# Altium PCB Sheet1._(1).PcbDoc
Units mm, origin at the board's own origin, x right, y up, seen from the top; angles counter-clockwise.
Board outline 74.63 x 74.6 mm, 2 copper layers (Top Layer, Bottom Layer); 24 components, 18 nets, 72 pads, 0 vias.
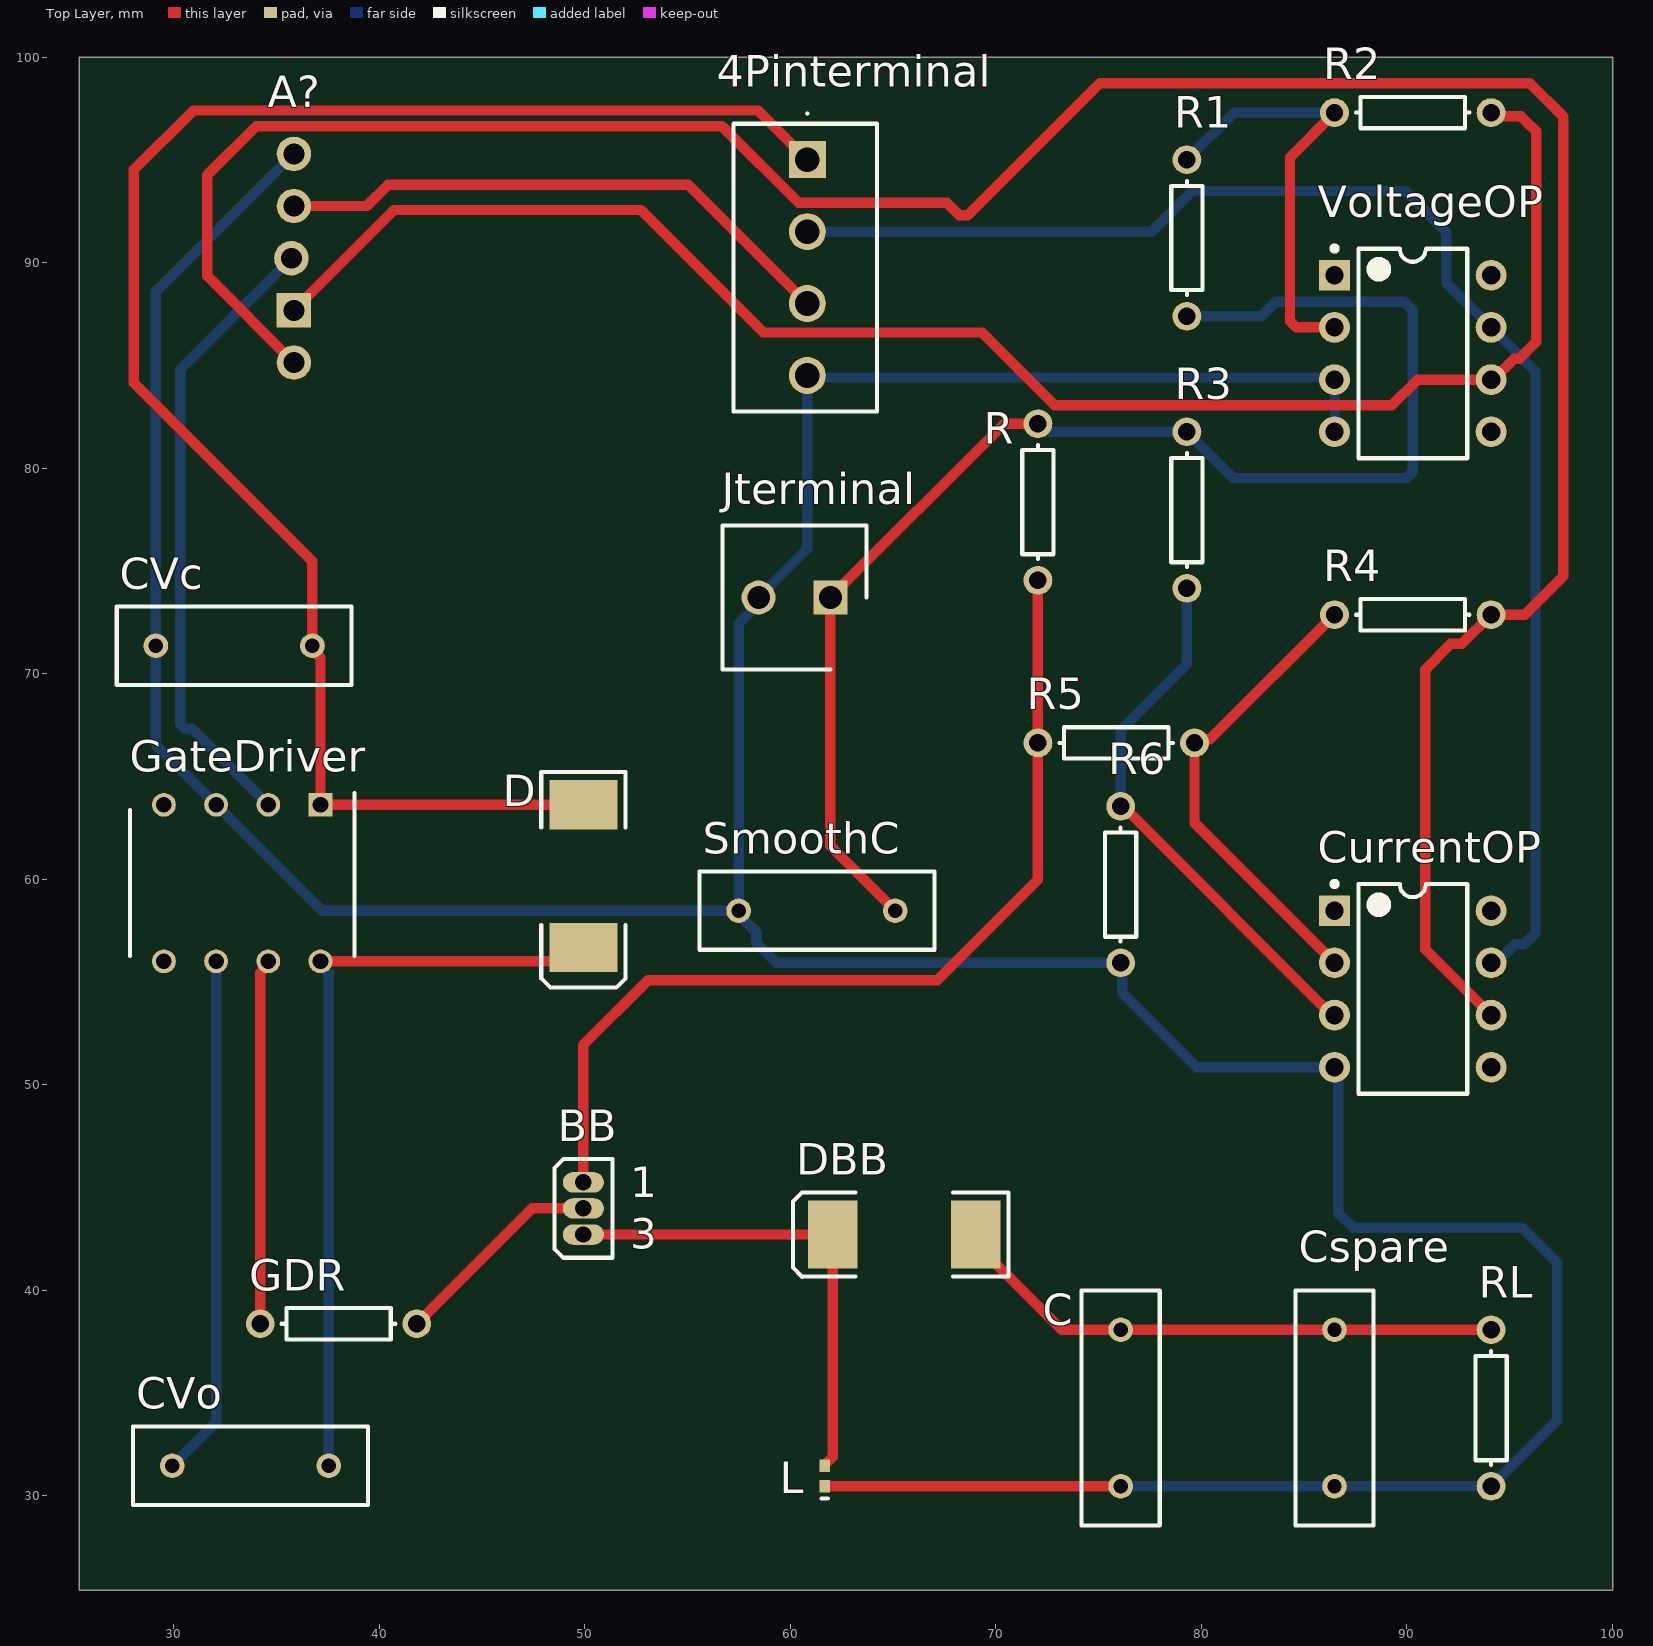
[diagram p0: Top Layer view]
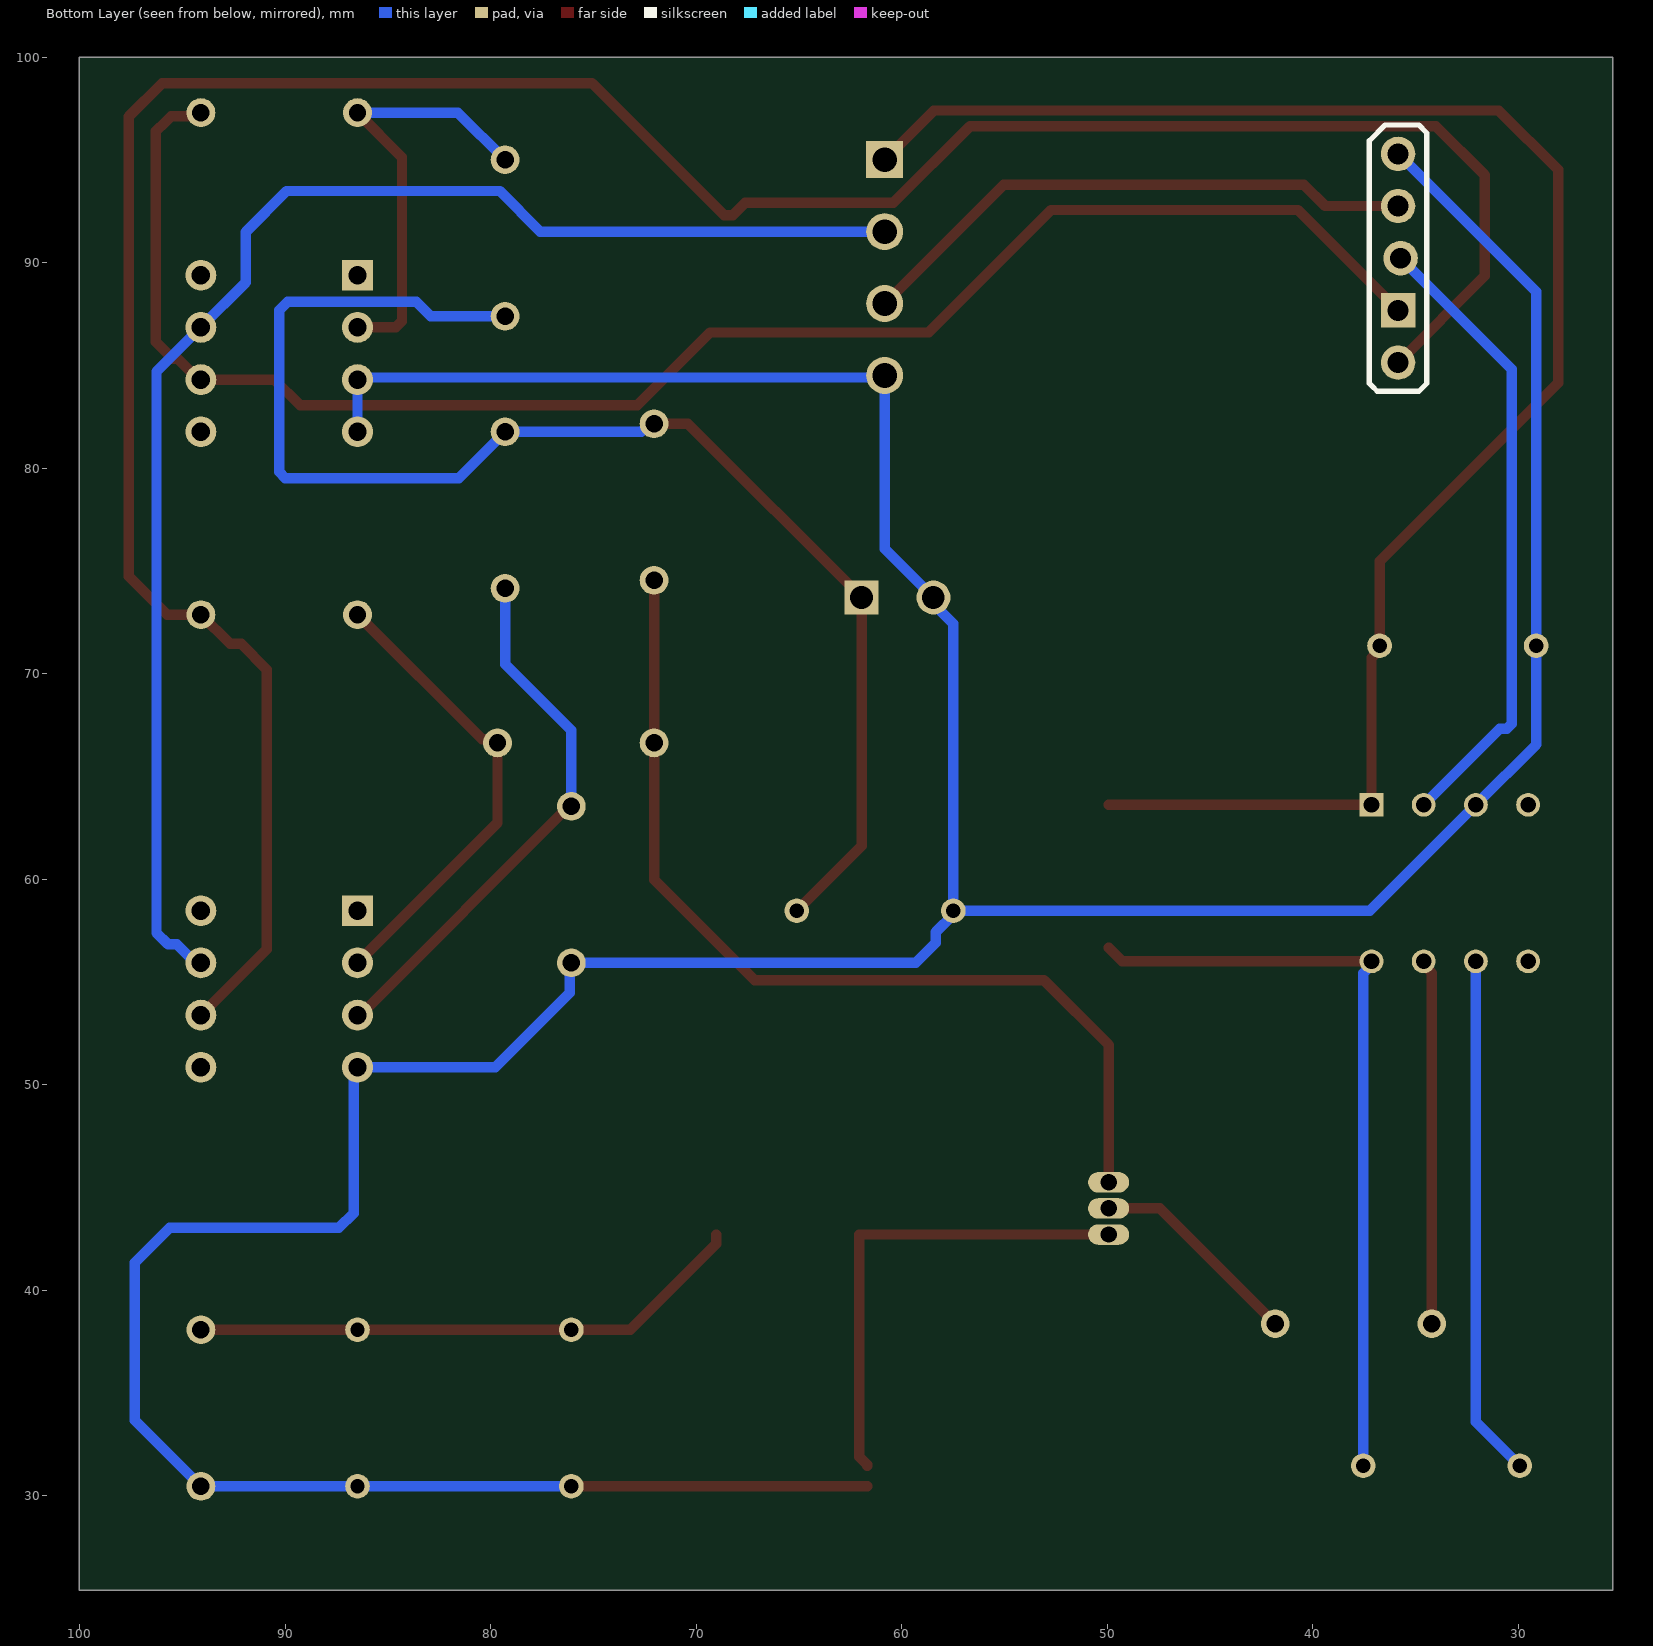
[diagram p1: Bottom Layer view, seen from below]

## Layer stack, top to bottom
Top Solder: solder mask 0.0102, Solder Resist, Dk 3.5
Top Layer: signal copper 0.0356
Dielectric 1: dielectric 0.32, FR-4, Dk 4.8
Bottom Layer: signal copper 0.0356
Bottom Solder: solder mask 0.0102, Solder Resist, Dk 3.5

## Board outline
25.4,25.4 100.025,25.4 100.025,100 25.4,100

## Design rules (kind name [scope] priority, off if disabled: settings)
Clearance [All] p1: gap=0.254 ignorepadtopadclearanceinfootprint=FALSE except(0: Arc-Hole Track-Hole SMDPad-Hole THPad-Hole Via-Hole Fill-Hole Poly-Hole Region-Hole Text-Hole)
PolygonConnect [All] p1: connectstyle=Relief reliefconductorwidth=0.254 reliefentries=4 polygonreliefangle="90 Angle" airgapwidth=0.254
RoomDefinition Sheet1._(1) [InComponentClass('Sheet1._(1)')] p1: confinementstyle=ConfineIn formatcopy=TRUE lockcomponents=FALSE outline 25.575,25.4 100.05,25.4 100.05,99.975 25.575,99.975
RoutingVias [All] p1: holewidth=0.711 width=1.27 viastyle="Through Hole" minholewidth=0.711 minwidth=1.27 maxholewidth=0.711 maxwidth=1.27
SolderMaskExpansion [All] p1: expansion=0.102 istentingtop=FALSE
Width [All] p1: maxlimit=0.762 minlimit=0.381 preferedwidth=0.508 minimp=50.000000 maximp=50.000000 favimp=50.000000
30 further rules are at their usual default settings.

## Components (designator, comment, footprint, x,y, rotation, side; value= is the part's Value field where it differs from the comment)
4Pinterminal "CTB3051_4BK" CTB30514BK 60.829,95.021 r270 top
A? "A000066" ARDUINO_A000066 33.301,138.488 r270 top
BB "MOSFET-N" E3 49.931,43.975 r0 top
C "Cap" RAD-0.3 76.081,34.26 r90 top value=0.2263mF
Cspare "Cap" RAD-0.3 86.49,34.26 r90 top value=0.2263mF
CurrentOP "OPA241" P0008A 90.3,54.659 r0 top
CVc "Cap" RAD-0.3 32.931,71.364 r180 top value=10uF
CVo "Cap" RAD-0.3 33.725,31.45 r180 top value=10uF
D "Diode" SMC 49.931,60.149 r270 top
DBB "Diode" SMC 65.55,42.705 r180 top
GateDriver "IR2117PBF" DIP762W56P254L988H533Q8N 33.323,59.814 r270 top
GDR "Res1" AXIAL-0.3 38.011,38.364 r180 top value=100
Jterminal "CTBP3051_2" HDRV2W90P0X350_1X2_700X700X850P 61.956,73.714 r180 top
L "Inductor" 0402-A 61.675,30.95 r90 top value=0.5963mH
R "shunt R" AXIAL-0.3 72.056,78.359 r90 top value=0.041
R1 "VR1" AXIAL-0.3 79.306,91.211 r90 top value=10k
R2 "Vfeedback" AXIAL-0.3 90.3,97.314 r0 top value=2900
R3 "IR1" AXIAL-0.3 79.306,77.969 r270 top value=1k
R4 "IRfeedback" AXIAL-0.3 90.3,72.875 r0 top value=99600
R5 "RnegativeIn" AXIAL-0.3 75.866,66.634 r0 top value=1k
R6 "Idivider4" AXIAL-0.3 76.081,59.739 r270 top value=99600
RL "Res1" AXIAL-0.3 94.11,34.26 r90 top value=100
SmoothC "Cap" RAD-0.3 61.296,58.469 r0 top value=50mF
VoltageOP "OPA241" P0008A 90.3,85.589 r0 top

## Footprints (in the part's own frame and the unit in brackets; to place one, negate y for a bottom-side part, rotate by r counter-clockwise, add the part's x,y. Pads: shape width x height; smd on the part's side, far side on the other; paste and mask are expansions set on the pad)
0402-A [mm] "Chip Inductor, Body 1.0x0.5mm, IPC High Density"
  rect 0.6x0.5 smd: 1(-0.5,0) 2(0.5,0)
  silkscreen extent -1.1,-0.15 -1.1,0.15, body extent -0.55,-0.3 0.55,0.3, height 0.55
ARDUINO_A000066 [mil]
  rect 66x66 hole 40: A0(2000,100)
  round 66 hole 40: A1(2100,100) D3(1900,95) GND_1(1700,100) VIN(1800,100)
AXIAL-0.3 [mm] "Axial Device, Thru-Hole; 2 Leads; 0.3 in Pin Spacing"
  round 1.4 hole 0.85: 1(-3.81,0) 2(3.81,0)
  silkscreen extent -2.77,-0.76 2.77,0.76
CTB30514BK [mm]
  rect 1.8x1.8 hole 1.2: 1(0,0)
  round 1.8 hole 1.2: 2(3.5,0) 3(7,0) 4(10.5,0)
  silkscreen extent -2.3,-3.6 12.25,3.4, body extent -1.75,-3.6 12.25,3.4, height 8.6
DIP762W56P254L988H533Q8N [mm]
  rect 1.158x1.158 hole 0.758: 1(-3.81,3.81)
  round 1.158 hole 0.758: 2(-3.81,1.27) 3(-3.81,-1.27) 4(-3.81,-3.81) 5(3.81,-3.81) 6(3.81,-1.27) 7(3.81,1.27) 8(3.81,3.81)
  silkscreen extent -4.39,-5.46 3.55,5.46, body extent -3.95,-4.94 3.95,4.94, height 5.33
E3 [mm] "TO, Flat Index; 3 In-Line, Axial Leads; Body Dia. 4.6mm; Lead Dia. 0.5 mm (max)"
  oval 2x1 hole 0.8: 1(0,1.27) 2(0,0) 3(0,-1.27)
  silkscreen extent -1.41,-2.41 1.41,2.41
HDRV2W90P0X350_1X2_700X700X850P [mm]
  rect 1.65x1.65 hole 1.1: 1(0,0)
  round 1.65 hole 1.1: 2(3.5,0)
  silkscreen extent -1.75,-3.5 5.25,3.5, body extent -1.75,-3.5 5.25,3.5, height 8.5
P0008A [mm] "DIP, 8-Leads, Body 10.15x6.6mm, Pitch 2.54mm"
  rect 1.5x1.5 hole 0.9: 1(-3.81,3.81)
  round 1.5 hole 0.9: 2(-3.81,1.27) 3(-3.81,-1.27) 4(-3.81,-3.81) 5(3.81,-3.81) 6(3.81,-1.27) 7(3.81,1.27) 8(3.81,3.81)
  silkscreen extent -3.93,-5.1 2.65,5.23, body extent -3.95,-5.07 3.95,5.07, height 5.08
RAD-0.3 [mm] "Radial Cap, Thru-Hole; 2 Leads; 0.3 in Pin Spacing"
  round 1.2 hole 0.7: 1(-3.81,0) 2(3.81,0)
  silkscreen extent -5.71,-1.91 5.71,1.91
SMC [mm] "DO-214-AB/SMC; 2 C-Bend Leads; Body 7.9 x 5.9 mm, inc. leads (LxW)"
  rect 2.4x3.3 smd: 1(-3.475,0) 2(3.475,0)
  silkscreen extent -5.07,-2.05 5.43,2.05

## Part data
4Pinterminal: "Connector", Manufacturer_Name="RS Components", Manufacturer_Part_Number=CTB3051/4BK, RS Part Number=8971339, Height=8.5mm, RS Price/Stock=https://uk.rs-online.com/web/p/products/8971339
A?: "Plated Through Hole Protoboard Arduino Mega Platform Evaluation Expansion Board", Package=None, Availability="In Stock", Check_prices=https://www.snapeda.com/parts/ARDUINO%20UNO%20REV3/Arduino/view-part/1128320/?ref=eda, MF=Arduino, MP="ARDUINO UNO REV3", Price=None, SnapEDA_Link=https://www.snapeda.com/parts/ARDUINO%20UNO%20REV3/Arduino/view-part/1128320/?ref=snap
BB: "N-Channel MOSFET", LatestRevisionDate=17-Jul-2002, LatestRevisionNote="Re-released for DXP Platform.", PackageDescription="TO, Flat Index; 3 In-Line, Axial Leads; Body Dia. 4.6mm; Lead Dia. 0.5 mm (max)", PackageReference=E3, PackageVersion=1995/1996, Published=8-Jun-2000, Publisher="Altium Limited"
C Cspare CVc CVo SmoothC: "Capacitor", LatestRevisionDate=17-Jul-2002, LatestRevisionNote="Re-released for DXP Platform.", PackageDescription="Radial Cap, Thru-Hole; 2 Leads; 0.3 in Pin Spacing", PackageReference=RAD-0.3, Published=8-Jun-2000, Publisher="Altium Limited"
CurrentOP VoltageOP: library part CMP-0272-01606-3, "Single-Supply, MicroPower Operational Amplifier, 2.7 to 36 V, -55 to 125 degC, 8-pin DIP (P8), Green (RoHS & no Sb/Br)", Manufacturer="Texas Instruments", PartNumber=OPA241PA, Rating=Catalog, Total Supply Voltage(Max)(+5V is 5, +/-5V is 10)=36, Total Supply Voltage(Min)(+5V is 5, +/-5V is 10)=2.7, CMRR(Min)(dB)=80, Code_JEDEC=MS-001, ComponentLink1Description="Manufacturer URL", ComponentLink1URL=http://www.ti.com/, ComponentLink2Description=Datasheet, ComponentLink2URL=http://www.ti.com/lit/ds/symlink/opa241.pdf, ComponentLink3Description="Package Specification", ComponentLink3URL=http://www.ti.com/litv/pdf/mpdi001b, DatasheetVersion=SBOS075, Eco-Plan="Green (RoHS & no Sb/Br)", GBW(Typ)(MHz)=0.035, IIB(Max)(pA)=20000, Iq per channel(Max)(mA)=0.03, Mounting Technology="Through Hole", Number of Channels=1, Offset Drift(Typ)(uV/C)=0.4, PackageDescription="8-Pin Plastic In-Line, Body 9.59 x 6.35 mm, Pitch 2.54 mm", PackageReference=P0008A, PackageVersion="4040082/E, 04/2010", Packing=TUBE, Slew Rate(Typ)(V/us)=0.01, Sub Family="High Supply Voltage Amplifier (>=30V), Low Offset Voltage Amplifier (<=500uV), Low Power Amp (<=500uA), Low Supply Voltage Amplifier (<=2.7V), Precision Amplifier", Vio (25C)(Max)(mV)=0.25
D DBB: "Default Diode", Code_JEDEC=DO-214-AB, LatestRevisionDate=17-Jul-2002, LatestRevisionNote="Re-released for DXP Platform.", PackageDescription="DO-214-AB/SMC; 2 C-Bend Leads; Body 7.9 x 5.9 mm, inc. leads (LxW)", PackageReference=SMC, PackageVersion=Sep-1996, Published=8-Jun-2000, Publisher="Altium Limited"
GateDriver: "Integrated Circuit", Manufacturer_Name=Infineon, Mouser Part Number=942-IR2117PBF, Arrow Part Number=IR2117PBF, Arrow Price/Stock=https://www.arrow.com/en/products/ir2117pbf/infineon-technologies-ag?region=nac, Datasheet Link=https://www.infineon.com/dgdl/ir2117.pdf?fileId=5546d462533600a4015355c84331168d, Height=5.33mm, Manufacturer_Part_Number=IR2117PBF, Mouser Price/Stock=https://www.mouser.co.uk/ProductDetail/Infineon-IR/IR2117PBF?qs=dQmlx5f5cRIDilT7sCxYHA%3D%3D
GDR RL: "Resistor", LatestRevisionDate=17-Jul-2002, LatestRevisionNote="Re-released for DXP Platform.", PackageDescription="Axial Device, Thru-Hole; 2 Leads; 0.3 in Pin Spacing", PackageReference=AXIAL-0.3, Published=8-Jun-2000, Publisher="Altium Limited"
Jterminal: "Connector", Manufacturer_Name=CAMDENBOSS, Manufacturer_Part_Number=CTBP3051/2, Datasheet Link=https://componentsearchengine.com/Datasheets/2/CTBP3051_2.pdf, Height=8.5mm
R R1 R2 R3 R4 R5 R6: library part Res1, "Resistor", LatestRevisionDate=17-Jul-2002, LatestRevisionNote="Re-released for DXP Platform.", PackageDescription="Axial Device, Thru-Hole; 2 Leads; 0.3 in Pin Spacing", PackageReference=AXIAL-0.3, Published=8-Jun-2000, Publisher="Altium Limited"
L: Code_IEC=1005, Code_JEITA=0402, LatestRevisionDate=29-May-2009, LatestRevisionNote="IPC-7351 Footprint Added.", PackageDescription="Chip Inductor", PackageReference=0402-A, Published=8-Jun-2000, Publisher="Altium Limited"

## Nets (pads, with @x,y where several pads share a name; then routed paths per layer and width w, separated by ;. In a path a pad name is that pad's centre, name@x,y a point inside that pad or via, vN(x,y) a via of type N, cw(c..) or ccw(c..) an arc to the next point about the centre after c; other vN are vias at no path point)
GND: 4Pinterminal.4 A?.GND_1 C.1 Cspare.1 CurrentOP.4 CVc.2 GateDriver.3 Jterminal.2 L.1 R6.2 RL.1 SmoothC.1 VoltageOP.3 VoltageOP.4 | length 215.8
  Top Layer w0.508: L.1 C.1
  Bottom Layer w0.508: A?.GND_1 29.121,88.588 CVc.2 29.121,66.556 GateDriver.3 37.208,58.469 SmoothC.1 ; C.1 Cspare.1 RL.1 97.325,33.665 97.325,41.325 95.625,43.025 87.4,43.025 86.675,43.75 86.675,50.664 CurrentOP.4 79.776,50.849 76.158,54.467 76.158,55.852 R6.2 59.321,55.929 59.026,56.224 58.337,56.913 58.337,57.431 57.486,58.282 SmoothC.1 ; VoltageOP.4 VoltageOP.3 86.389,84.42 60.93,84.42 4Pinterminal.4 60.829,76.087 Jterminal.2 58.456,73.41 57.486,72.44 SmoothC.1
Net4Pinterminal_5: 4Pinterminal.3 A?.VIN | length 27.8
  Top Layer w0.508: A?.VIN 39.393,92.768 40.438,93.813 55.036,93.813 4Pinterminal.3
Net4Pinterminal_12: 4Pinterminal.2 CurrentOP.7 VoltageOP.7 | length 71.4
  Bottom Layer w0.508: 4Pinterminal.2 60.833,91.525 77.6,91.525 79.575,93.5 89.927,93.5 91.924,91.504 91.924,89.045 VoltageOP.7 96.275,84.694 96.275,57.398 95.715,56.837 95.287,56.837 94.378,55.929 CurrentOP.7
Net4Pinterminal_15: 4Pinterminal.1 CVc.1 D.1 GateDriver.1 | length 82.4
  Top Layer w0.508: D.1 GateDriver.1 37.133,70.785 36.741,71.177 CVc.1 36.741,75.484 28.05,84.175 28.05,94.525 30.941,97.416 58.433,97.416 4Pinterminal.1
NetA?_A0: A?.A0 R2.2 VoltageOP.6 | length 80.5
  Top Layer w0.508: A?.A0 40.728,92.575 52.725,92.575 58.687,86.613 69.321,86.613 72.872,83.061 89.276,83.061 90.534,84.319 VoltageOP.6 94.227,84.319 95.238,85.329 95.479,85.329 96.3,86.15 96.3,96.4 95.824,96.876 95.557,97.143 94.281,97.143 R2.2
NetA?_A1: A?.A1 CurrentOP.6 R4.2 | length 132.1
  Top Layer w0.508: A?.A1 31.625,89.364 31.625,94.277 34.002,96.654 56.677,96.654 60.402,92.929 67.621,92.929 68.227,92.323 68.648,92.323 75.075,98.75 96,98.75 97.625,97.125 97.625,74.75 95.75,72.875 R4.2 92.688,71.453 92.151,71.453 90.9,70.202 90.9,56.599 CurrentOP.6
NetA?_D3: A?.D3 GateDriver.2 | length 30.8
  Bottom Layer w0.508: GateDriver.2 30.892,67.325 30.548,67.325 30.304,67.569 30.304,84.818 A?.D3
NetBB_1: BB.1 R5.1 R.1 | length 46.7
  Top Layer w0.508: BB.1 49.931,51.931 53.075,55.075 67.15,55.075 72.056,59.981 R5.1 R.1
NetBB_2: BB.2 GDR.1 | length 10.4
  Top Layer w0.508: GDR.1 47.432,43.975 BB.2
NetBB_3: BB.3 DBB.2 L.2 | length 23.6
  Top Layer w0.508: BB.3 DBB.2 62.075,31.892 61.675,31.492 L.2
NetC_2: C.2 Cspare.2 DBB.1 RL.2 | length 27.3
  Top Layer w0.508: DBB.1 69.025,42.255 73.21,38.07 C.2 Cspare.2 RL.2
NetCurrentOP_2: CurrentOP.2 R4.1 R5.2 | length 22.9
  Top Layer w0.508: CurrentOP.2 79.676,62.743 R5.2 79.847,66.805 80.42,66.805 R4.1
NetCurrentOP_3: CurrentOP.3 R3.2 R6.1 | length 26.6
  Top Layer w0.508: R6.1 76.205,63.549 86.365,53.389 CurrentOP.3
  Bottom Layer w0.508: R6.1 76.081,67.242 79.306,70.466 R3.2
NetCVo_1: CVo.1 D.2 GateDriver.8 | length 37.8
  Top Layer w0.508: GateDriver.8 49.261,56.004 D.2
  Bottom Layer w0.508: GateDriver.8 37.133,55.828 37.535,55.426 CVo.1
NetCVo_2: CVo.2 GateDriver.6 | length 25.4
  Bottom Layer w0.508: CVo.2 32.053,33.588 GateDriver.6
NetGateDriver_7: GateDriver.7 GDR.2 | length 17.8
  Top Layer w0.508: GDR.2 34.201,55.436 34.593,55.828 GateDriver.7
NetJterminal_1: Jterminal.1 R1.1 R3.1 R.2 SmoothC.2 | length 69
  Top Layer w0.508: SmoothC.2 61.956,61.619 Jterminal.1 70.411,82.169 R.2
  Bottom Layer w0.508: R.2 72.297,82.169 72.687,81.779 R3.1 81.56,79.525 90.002,79.525 90.3,79.823 90.3,87.7 90.149,87.851 89.883,88.117 83.637,88.117 82.921,87.401 R1.1
NetR1_2: R1.2 R2.1 VoltageOP.2 | length 21.5
  Top Layer w0.508: VoltageOP.2 84.623,86.859 84.325,87.157 84.325,95.149 R2.1
  Bottom Layer w0.508: R1.2 81.599,97.314 R2.1
pads on no net: CurrentOP.1 CurrentOP.5 CurrentOP.8 GateDriver.4 GateDriver.5 VoltageOP.1 VoltageOP.5 VoltageOP.8

## Text inside footprints (layer, text, board x,y; h text height)
BB: Top Overlay "1" at 52.206,44.53 h1.5; Top Overlay "3" at 52.206,42.012 h1.5